# EAGLE board XBee3 (EAGLE 7.4.0)
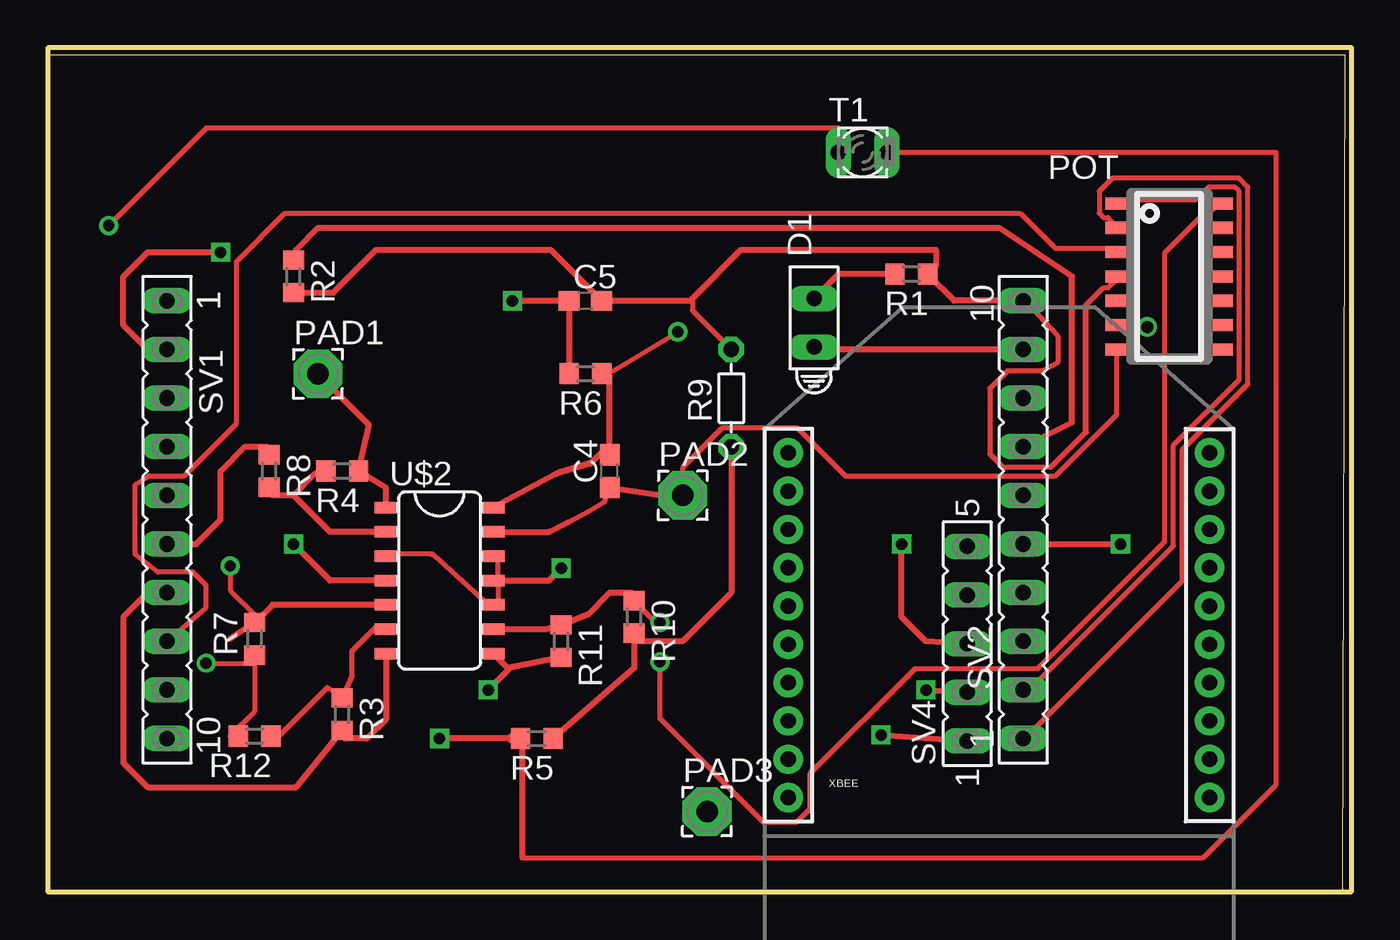
[diagram p0: board, top side]
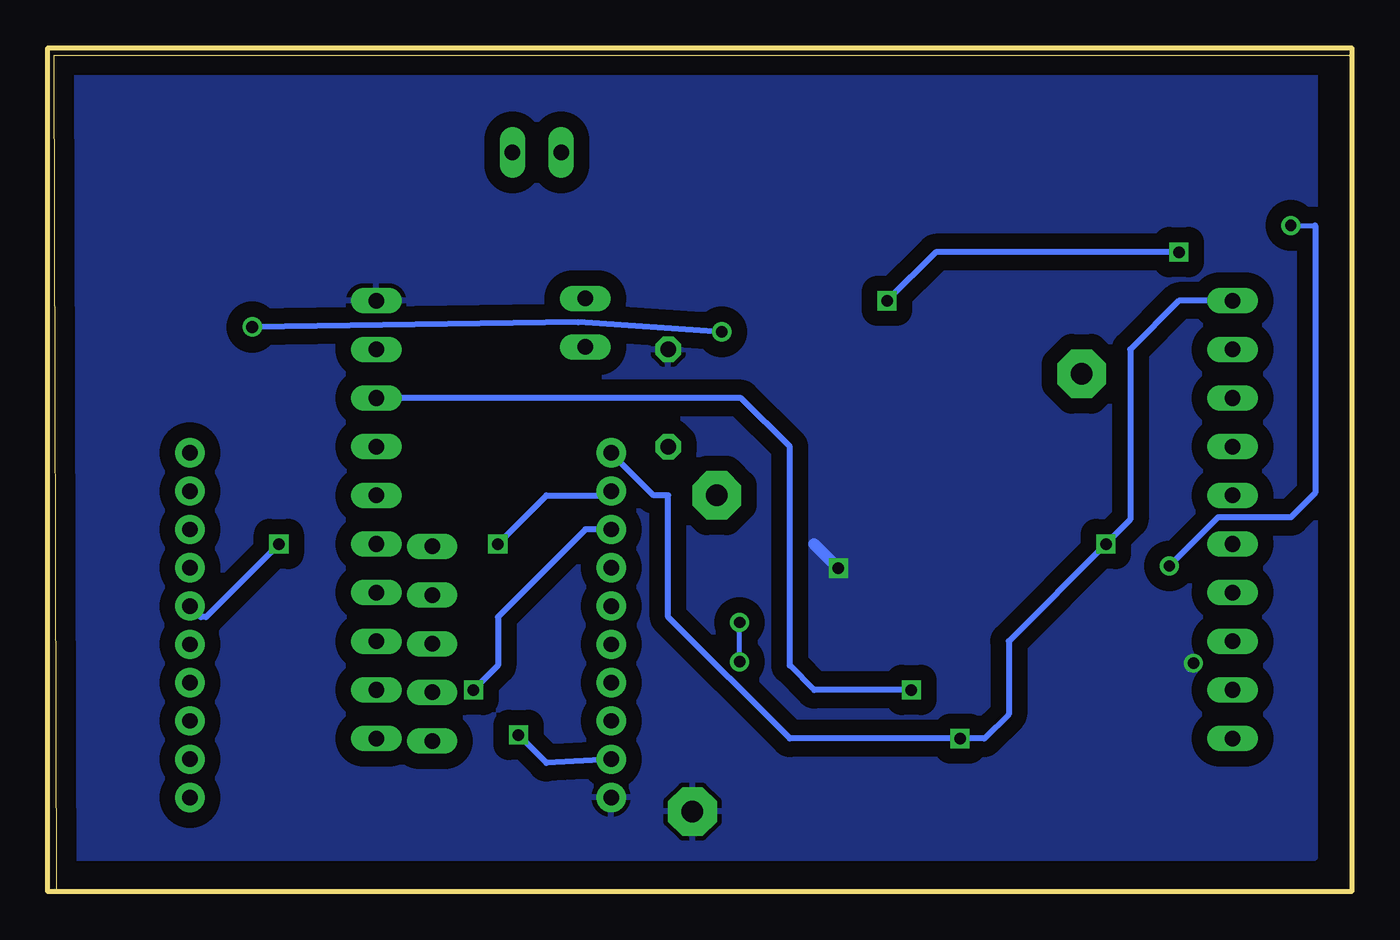
[diagram p1: board, bottom side, seen from below]

Size 68.07 x 44.07 mm. Coordinates in mm from the lower left corner, seen from the top.
Outline: 67.61,0 67.74,43.68 0,43.68
Outline: 0,43.68 0,44.07 68.07,44.07 68.07,0 67.61,0
Outline: 0,43.68 0,0 67.61,0
Copper layers (1*16): Top 0.035mm / dielectric 1.5mm / Bottom 0.035mm
Design rules "default *": minimum track width 10mil, minimum drill 23mil, track to track 8mil, track to pad 8mil, pad to pad 8mil, via to via 8mil, smd to smd 8mil, copper to edge 40mil, drill to drill 8mil, minimum pad ring 10mil, minimum via ring 8mil, stop-mask expansion 4mil, vias tented up to drill 0mil, thermal gap 10mil

## Footprints (pad centres in the part's own frame; a part is rotated, then mirrored left to right if it is on the bottom)
C0603 = smd 1.1 x 1: 1 -0.85,0; 2 0.85,0
HLMP6 = drill 0.813 long: A -1.27,0; K 1.27,0
2,54/1,1 = drill 1.118 pad 2.54 octagon: 1 0,0
SO014 = smd 1.27 x 0.635: P1 -2.692,3.81; P2 -2.692,2.54; P3 -2.692,1.27; P4 -2.692,0; P5 -2.692,-1.27; P6 -2.692,-2.54; P7 -2.692,-3.81; P8 2.692,-3.81; P9 2.692,-2.54; P10 2.692,-1.27; P11 2.692,0; P12 2.692,1.27; P13 2.692,2.54; P14 2.692,3.81
R0603 = smd 1 x 1.1: 1 -0.85,0; 2 0.85,0
R-5 = drill 0.813 octagon: 1 -2.54,0; 2 2.54,0
FE10 = drill 0.813 long: 1 -11.43,0; 2 -8.89,0; 3 -6.35,0; 4 -3.81,0; 5 -1.27,0; 6 1.27,0; 7 3.81,0; 8 6.35,0; 9 8.89,0; 10 11.43,0
FE05-1 = drill 0.813 long: 1 -5.08,0; 2 -2.54,0; 3 0,0; 4 2.54,0; 5 5.08,0
BPX81 = drill 0.813 long: C 1.27,0; E -1.27,0
SO014' = smd 0.6 x 1.2: 1 -3.175,-2.8; 2 -1.905,-2.8; 3 -0.635,-2.8; 4 0.635,-2.8; 5 1.905,-2.8; 6 3.175,-2.8; 7 4.445,-2.8; 8 4.445,2.8; 9 3.175,2.8; 10 1.905,2.8; 11 0.635,2.8; 12 -0.635,2.8; 13 -1.905,2.8; 14 -3.175,2.8
XBEE-1 = drill 0.8 pad 1.524: 1 -11,20; 2 -11,18; 3 -11,16; 4 -11,14; 5 -11,12; 6 -11,10; 7 -11,8; 8 -11,6; 9 -11,4; 10 -11,2; 11 11,2; 12 11,4; 13 11,6; 14 11,8; 15 11,10; 16 11,12; 17 11,14; 18 11,16; 19 11,18; 20 11,20

## Placement (x,y rotation side)
C4  [C0603]  29.34,21.97 90 top
C5  [C0603]  28.07,30.86 0 top
D1  HLMP6  [HLMP6]  40,29.72 90 top
PAD1  WIREPAD2,54/1,1  [2,54/1,1]  14.1,27.05 0 top
PAD2  WIREPAD2,54/1,1  [2,54/1,1]  33.15,20.7 0 top
PAD3  WIREPAD2,54/1,1  [2,54/1,1]  34.42,4.19 0 top
POT  MCP42X1_DIGITAL_POTSO014  [SO014]  58.55,32.13 0 top
R1  [R0603]  45.09,32.26 180 top
R2  [R0603]  12.83,32.13 270 top
R3  [R0603]  15.37,9.27 270 top
R4  [R0603]  15.37,21.97 180 top
R5  [R0603]  25.53,8 180 top
R6  [R0603]  28.07,27.05 180 top
R7  [R0603]  10.79,13.21 90 top
R8  [R0603]  11.56,21.97 270 top
R9  THERMISTOR-5  [R-5]  35.69,25.78 90 top
R10  [R0603]  30.61,14.35 270 top
R11  [R0603]  26.8,13.08 270 top
R12  [R0603]  10.79,8.13 180 top
SV1  TI_Left_header  [FE10]  6.22,19.43 270 top
SV2  TI_Right_Header  [FE10]  50.93,19.43 90 top
SV4  [FE05-1]  48.01,12.95 90 top
T1  BPX81  [BPX81]  42.55,38.61 0 top
U$2  MCP6004  [SO014']  20.45,16.89 270 top
XBEE  XBEE-1B1  [XBEE-1]  49.66,2.92 0 top

## Library data of the parts
C4 C5 = rcl
D1 = display-hp; MF: AGILENT TECHNOLOGIES; MPN: HLMP-6500; OC_FARNELL: 1652490; OC_NEWARK: 40K0088
PAD1-PAD3 = wirepad
POT = JackLibrary
R1-R8 R10-R12 = resistor
R9 = varistor
SV1 SV2 SV4 = con-lsta; OC_FARNELL: unknown; OC_NEWARK: unknown
T1 = opto-trans-siemens; OC_FARNELL: unknown; OC_NEWARK: unknown
U$2 = SparkFun-AnalogIC
XBEE = SparkFun-RF

## Nets
GND: C5.2 PAD3.1 POT.P4 R1.1 R2.2 R7.1 R9.2 R12.2 SV2.10 U$2.3 U$2.10 U$2.11 U$2.12 XBEE.10
N$1: D1.K R1.2
N$2: R7.2 T1.E U$2.5
N$3: SV4.3 XBEE.2
N$4: SV4.1 XBEE.9
N$5: SV4.2 XBEE.3
N$6: R3.1 R12.1 U$2.6
N$11: R2.1 SV2.7
N$12: R11.2 SV2.8 U$2.8
N$13: POT.P14 R10.1 R11.1 U$2.9
N$14: PAD1.1 R4.1 U$2.1
N$15: D1.A SV2.9
N$17: C4.1 PAD2.1 POT.P7 U$2.13
N$18: C4.2 POT.P6 R6.1 U$2.14
N$19: C5.1 R6.2 SV1.2
N$20: R5.1 R9.1 R10.2
N$21: R4.2 R8.2 U$2.2
N$22: SV2.5 XBEE.16
POT_CS: POT.P1 SV2.2
POT_SCK: POT.P2 SV2.1
POT_SDI: POT.P3 SV1.8
PULSE: R8.1 SV1.6
TI_PN7_READ: R3.2 SV1.7 U$2.7
VCC: R5.2 SV1.1 T1.C U$2.4 XBEE.1

## Tracks (layer width: path | path; a pad name or v marks a point on that pad's centre or on a via)
GND  (via drill 0.58, 0.6)
  Top 0.254: 54.2,30.63 55.12,31.55 55.35,31.55 55.8,32 POT.P4 | 54.2,24 52.38,22.17 49.86,22.17 49.17,22.86 49.17,26.29 50.09,27.2 51.92,27.2 52.73,27.64 52.73,29.01 51,30.86 SV2.10 | 20.19,17.53 22.86,15.11 U$2.10 23.49,15.11 23.49,16.38 | 20.19,17.53 19.94,17.65 | 19.94,17.65 20.07,17.65 20.19,17.53 | 19.94,17.65 17.78,17.65 U$2.3 | 23.49,16.38 23.49,17.65 U$2.12 | 23.49,16.38 U$2.11 | 9.53,8.13 10.79,9.4 R7.1 10.79,11.94 v8.26,11.94 | R9.2 33.66,30.35 33.66,30.99
  Top 0.305: U$2.11 26.16,16.26 v26.8,16.89 | 54.2,24 54.2,30.63 | 9.53,8.13 R12.2 | R2.2 14.9,31.28 17.15,33.53 26.25,33.53 C5.2 33.53,30.86 33.66,30.99 36.2,33.53 46.35,33.53 46.35,32.68 R1.1 47.33,30.86 SV2.10
  Bottom 0.254: v8.26,11.94 8.48,11.61
  Bottom 0.61: v26.8,16.89 28.07,18.16
  pour Bottom (isolate 0.813): 1.9,1.78 1.9,43.18 66.67,43.05 66.67,1.78
N$1
  Top 0.305: R1.2 41.27,32.26 D1.K
N$2  (via drill 0.58)
  Top 0.254: v9.53,17.02 9.53,15.75 10.79,14.48 R7.2 | v3.18,34.8 8.26,39.88 41.27,39.88 T1.E
  Top 0.305: 9.53,13.21 R7.2 11.72,14.99 U$2.5
  Bottom 0.254: v3.18,34.8 1.9,34.8
  Bottom 0.305: v9.53,17.02 6.99,19.56 3.18,19.56 1.9,20.83 1.9,34.8
N$3  (via drill 0.6)
  Top 0.305: SV4.3 45.85,13.08 44.58,14.35 v44.58,18.16
  Bottom 0.305: v44.58,18.16 42.04,20.7 38.88,20.7 XBEE.2
N$4  (via drill 0.6)
  Top 0.305: v43.5,8.19 SV4.1
  Bottom 0.305: XBEE.9 42.04,6.73 v43.5,8.19
N$5  (via drill 0.6)
  Top 0.305: v45.85,10.54 SV4.2
  Bottom 0.305: XBEE.3 40.01,18.92 44.58,14.35 44.58,11.81 v45.85,10.54
N$6
  Top 0.254: U$2.6 17.15,13.84 15.88,12.57 15.88,11.3 R3.1 14.6,10.67 12.06,8.13 R12.1
N$11
  Top 0.305: SV2.7 53.47,24.51 53.47,32.13 49.66,34.67 14.1,34.67 12.96,33.53 R2.1
N$12  (via drill 0.6)
  Top 0.305: U$2.8 24.01,11.68 R11.2 24.13,11.68 v22.99,10.54
  Bottom 0.305: v22.99,10.54 28.07,10.54 29.34,11.81 29.34,23.24 31.88,25.78 SV2.8
N$13  (via drill 0.58)
  Top 0.254: 37.29,3.66 37.44,3.66 | 37.44,3.66 39.12,3.66 39.8,4.34 39.8,6.17 45.29,11.66 51.69,11.66 58.32,18.29 58.32,33.38 60.38,35.43 60.6,35.43 61.06,35.89 POT.P14 | v31.95,14.07 31.73,14.07 30.81,14.99 R10.1 | v31.95,12.01 31.95,9.04 37.44,3.56 37.44,3.66
  Top 0.305: U$2.9 26.03,13.72 R11.1 28.14,14.48 28.2,14.48 29.34,15.62 30.48,15.62 R10.1
  Bottom 0.254: v31.95,12.01 v31.95,14.07
N$14
  Top 0.305: U$2.1 17.65,21.09 R4.1 16.77,24.38 PAD1.1
N$15
  Top 0.305: SV2.9 40.13,28.32 D1.A
N$17
  Top 0.254: 33.17,21.03 33.17,22.17 35.23,24.23 39.12,24.23 41.63,21.72 52.6,21.72 55.8,24.92 55.8,28.12 POT.P7 | 27.18,19.3 28.14,19.81 29.06,20.34 C4.1
  Top 0.305: C4.1 33.02,20.57 PAD2.1 33.17,21.03 | U$2.13 26.16,18.8 27.18,19.3
N$18  (via drill 0.61)
  Top 0.254: v57.4,29.49 56.03,29.49 POT.P6 | v32.89,29.23 29.52,27.2 R6.1 29.29,26.98 29.34,26.92 | 29.06,23.09 C4.2
  Top 0.305: C4.2 29.34,26.92 | 28.32,22.35 27.44,22.1 26.51,21.8 | 26.51,21.8 U$2.14 | 29.06,23.09 28.4,22.43 26.77,21.92 26.51,21.8
  Bottom 0.305: v57.4,29.49 40.39,29.74 v32.89,29.23
N$19  (via drill 0.6)
  Top 0.305: R6.2 C5.1 v24.26,30.86 | SV1.2 5.21,28.32 3.94,29.59 3.94,32.13 5.21,33.4 v9.02,33.4
  Bottom 0.305: v9.02,33.4 21.72,33.4 v24.26,30.86
N$20
  Top 0.305: R9.1 35.69,15.62 33.15,13.08 30.74,13.08 R10.2 30.61,11.68 R5.1
N$21
  Top 0.305: U$2.2 14.73,18.8 12.83,20.7 | 12.83,20.7 11.69,20.7 R8.2 | R4.2 13.97,21.84 12.83,20.7
N$22  (via drill 0.6)
  Top 0.305: SV2.5 v56.01,18.16
  Bottom 0.305: v56.01,18.16 59.82,14.35 60.09,14.35 XBEE.16
POT_CS
  Top 0.254: POT.P1 56.03,36.12 59.92,36.12 60.6,36.8 61.98,36.8 62.2,36.58 62.2,26.75 58.78,23.32 58.78,18.06 51.46,10.74 51,10.74 SV2.2
POT_SCK
  Top 0.254: POT.P2 55.8,34.75 55.35,35.2 55.12,35.2 54.89,35.43 54.89,36.58 55.58,37.26 62.2,37.26 62.66,36.8 62.66,26.52 59.23,23.09 59.23,16.23 51,8 SV2.1
POT_SDI
  Top 0.254: SV1.8 8.26,14.86 8.26,16 7.57,16.69 5.74,16.69 4.57,17.6 4.57,21.26 5.28,21.72 7.11,21.72 9.85,24.46 9.85,32.92 12.37,35.43 50.77,35.43 52.6,33.6 55.8,33.6 POT.P3
PULSE
  Top 0.305: SV1.6 7.75,18.16 9.02,19.43 9.02,21.97 10.29,23.24 11.43,23.24 R8.1
TI_PN7_READ
  Top 0.305: SV1.7 5.21,15.62 3.94,14.35 3.94,6.73 5.21,5.46 12.96,5.46 R3.2 15.5,8 16.64,8 17.65,9.01 U$2.7
VCC  (via drill 0.6)
  Top 0.254: T1.C 64.14,38.61 64.14,5.59 60.33,1.78 24.77,1.78
  Top 0.305: v20.45,8 R5.2 24.77,8.13 24.77,1.78 | U$2.4 14.73,16.26 v12.83,18.16
  Top 0.61: R5.2 24.26,8
  Bottom 0.305: XBEE.1 36.44,20.7 35.69,20.7 35.69,14.35 29.34,8 v20.45,8 19.18,8 17.91,9.27 17.91,13.08 v12.83,18.16 11.56,19.43 11.56,28.32 9.02,30.86 SV1.1